# Altium PCB ThermistorMux.PcbDoc
Units mil, origin at the board's own origin, x right, y up, seen from the top; angles counter-clockwise.
Board outline 2508 x 3208 mil, 2 copper layers (Top Layer, Top, Bottom Layer, Bottom); 78 components, 38 nets, 180 pads, 36 vias.
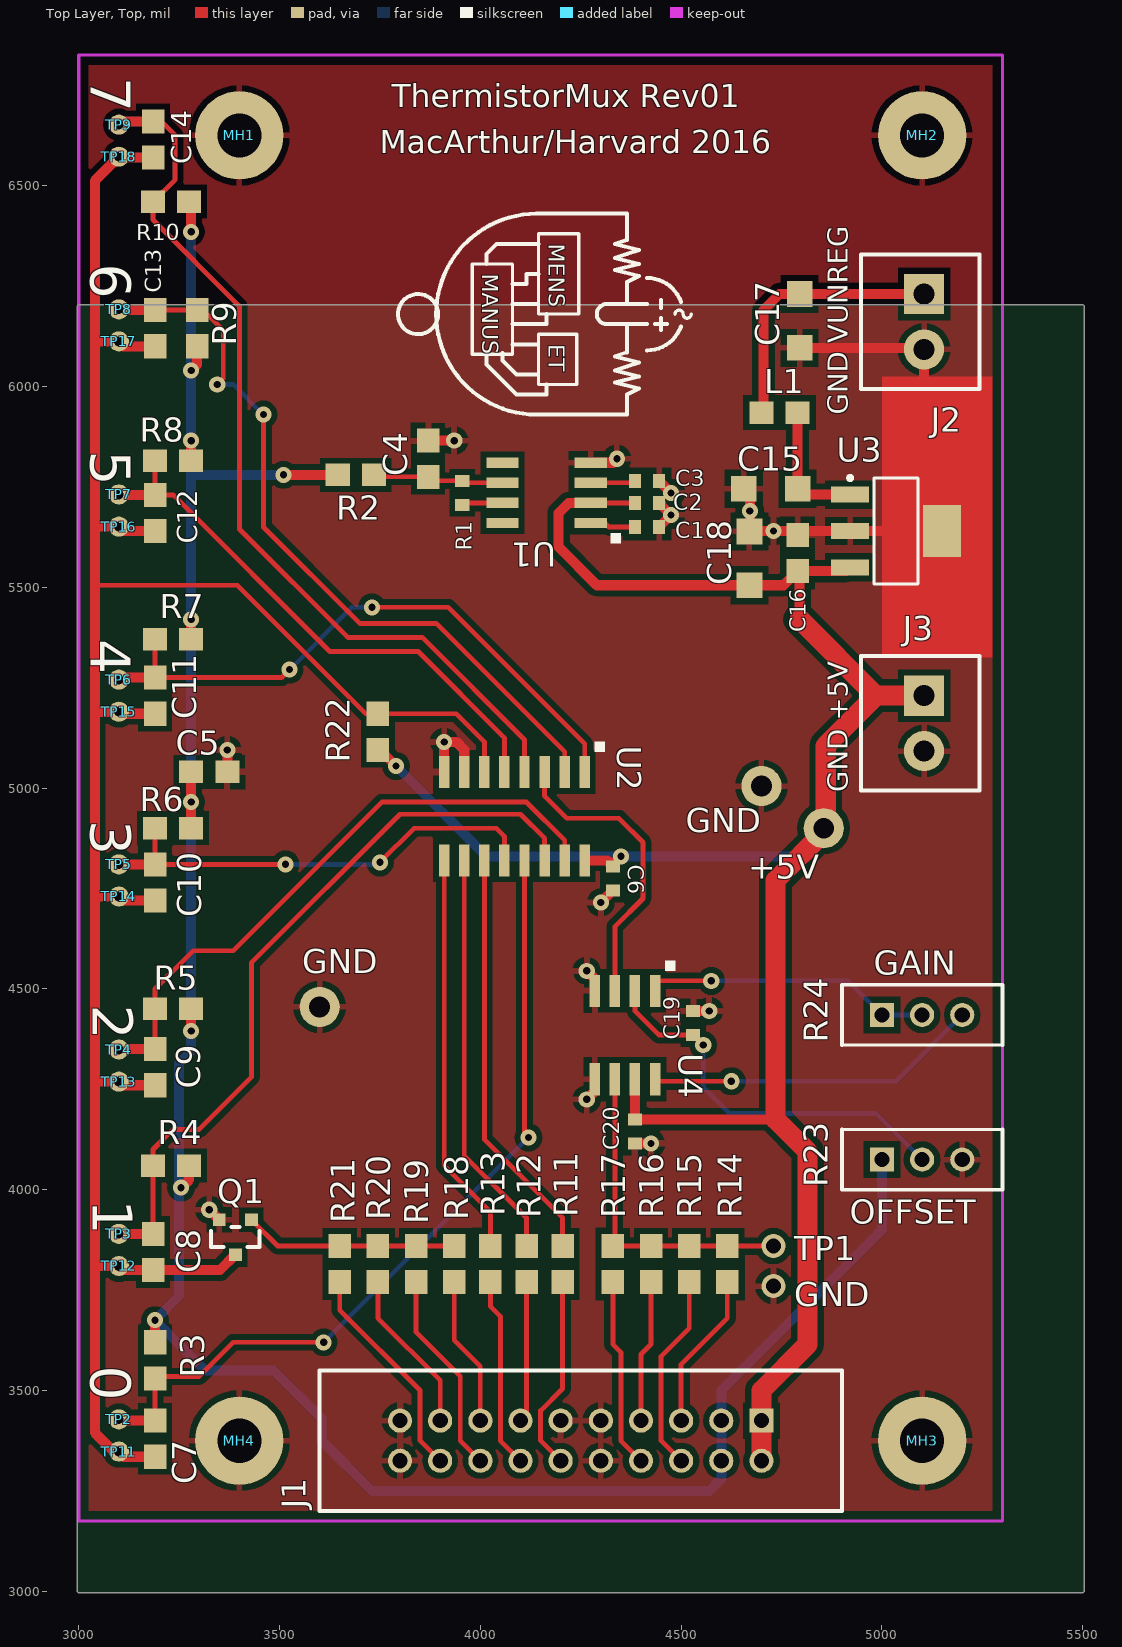
[diagram p0: Top Layer, Top view]
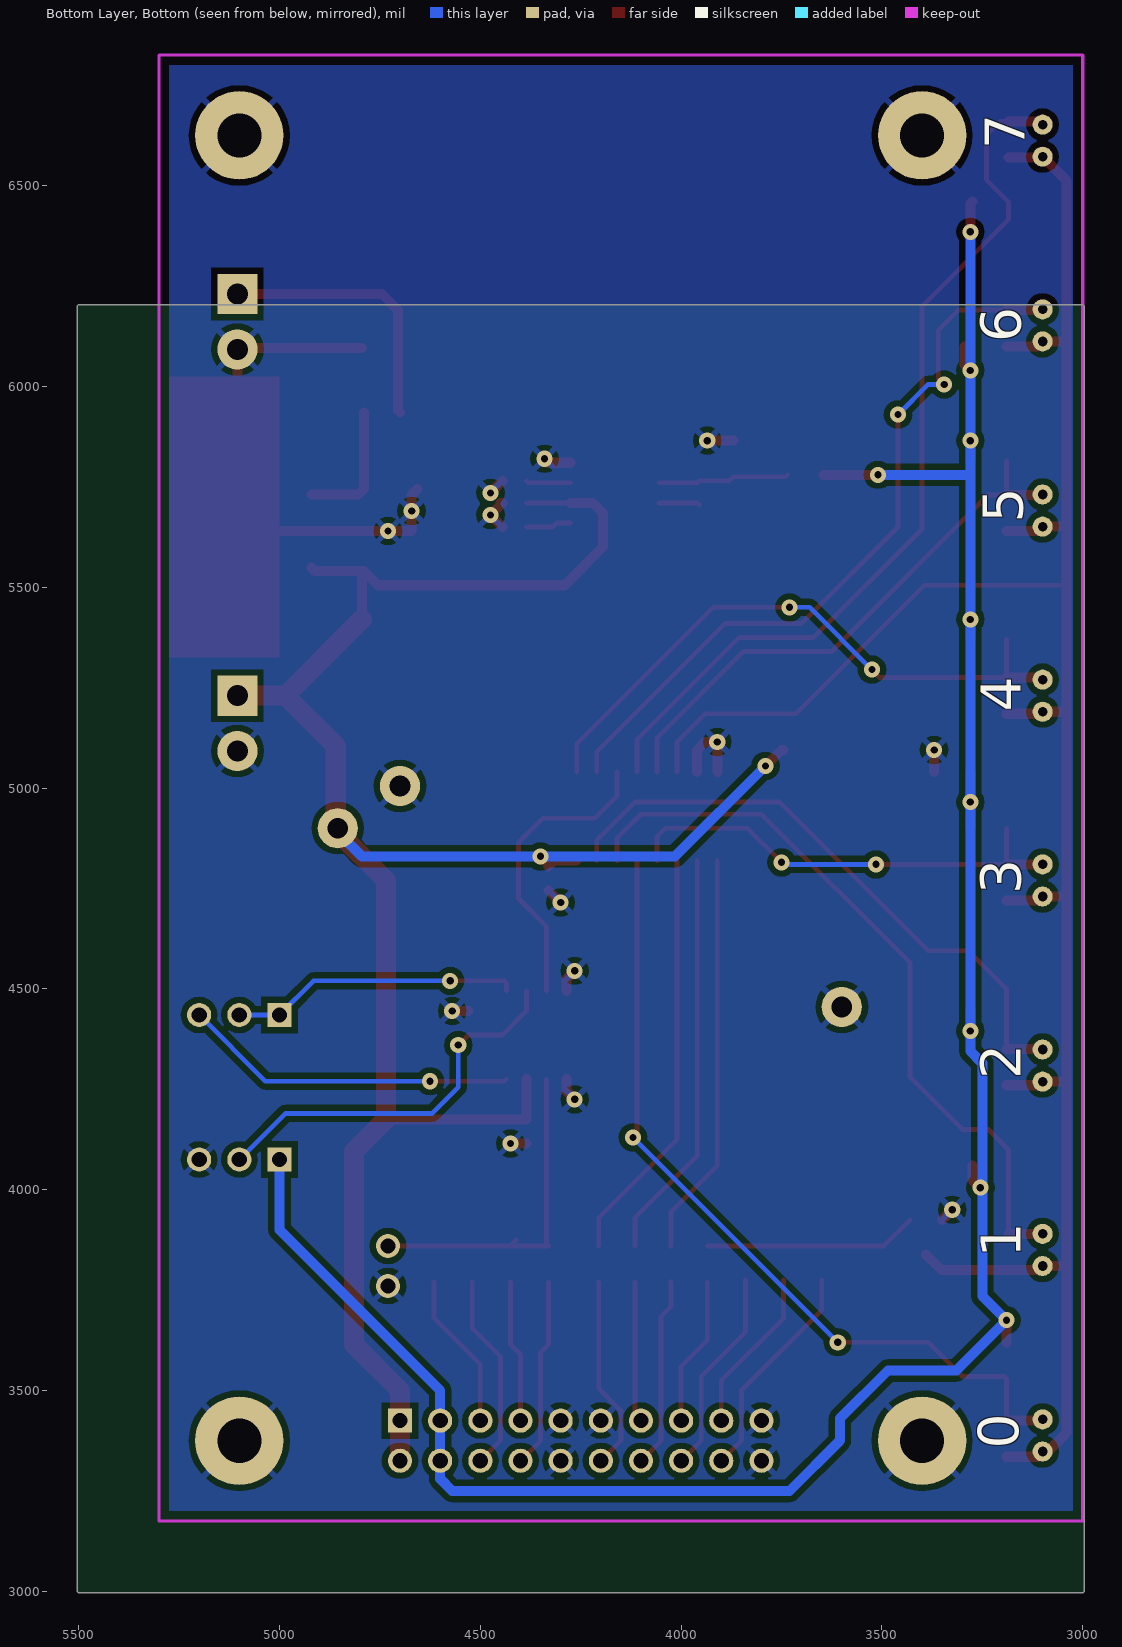
[diagram p1: Bottom Layer, Bottom view, seen from below]

## Layer stack, top to bottom
Top Solder, Top Mask: solder mask 0.4, Solder Resist, Dk 3.5
Top Layer, Top: signal copper 1.4
Dielectric1: dielectric 12.6, FR-4, Dk 4.8
Bottom Layer, Bottom: signal copper 1.4
Bottom Solder, Bot Mask: solder mask 0.4, Solder Resist, Dk 3.5

## Board outline
2996,3000 3000,2996 5500,2996 5504,3000 5504,6200 5500,6204 3000,6204 2996,6200

## Design rules (kind name [scope] priority, off if disabled: settings)
Clearance Clearance_1 [InPolygon] p1: gap=15
Clearance "Clearance_Top Layer, Top_PadToPad" [ExistsOnLayer('Top Layer, Top') And IsPad vs ExistsOnLayer('Top Layer, Top') And IsPad] p2: gap=10
Clearance "Clearance_Top Layer, Top_PadToLine" [ExistsOnLayer('Top Layer, Top') And IsPad vs ExistsOnLayer('Top Layer, Top') And IsWire] p3: gap=10
Clearance "Clearance_Top Layer, Top_LineToLine" [ExistsOnLayer('Top Layer, Top') And IsWire vs ExistsOnLayer('Top Layer, Top') And IsWire] p4: gap=10
Clearance "Clearance_Top Layer, Top_ViaToPad" [ExistsOnLayer('Top Layer, Top') And IsVia vs ExistsOnLayer('Top Layer, Top') And IsPad] p5: gap=10
Clearance "Clearance_Top Layer, Top_ViaToLine" [ExistsOnLayer('Top Layer, Top') And IsVia vs ExistsOnLayer('Top Layer, Top') And IsWire] p6: gap=10
Clearance "Clearance_Top Layer, Top_ViaToVia" [ExistsOnLayer('Top Layer, Top') And IsVia vs ExistsOnLayer('Top Layer, Top') And IsVia] p7: gap=10
Clearance "Clearance_Bottom Layer, Bottom_PadToPad" [ExistsOnLayer('Bottom Layer, Bottom') And IsPad vs ExistsOnLayer('Bottom Layer, Bottom') And IsPad] p8: gap=10
Clearance "Clearance_Bottom Layer, Bottom_PadToLine" [ExistsOnLayer('Bottom Layer, Bottom') And IsPad vs ExistsOnLayer('Bottom Layer, Bottom') And IsWire] p9: gap=10
Clearance "Clearance_Bottom Layer, Bottom_LineToLine" [ExistsOnLayer('Bottom Layer, Bottom') And IsWire vs ExistsOnLayer('Bottom Layer, Bottom') And IsWire] p10: gap=10
Clearance "Clearance_Bottom Layer, Bottom_ViaToPad" [ExistsOnLayer('Bottom Layer, Bottom') And IsVia vs ExistsOnLayer('Bottom Layer, Bottom') And IsPad] p11: gap=10
Clearance "Clearance_Bottom Layer, Bottom_ViaToLine" [ExistsOnLayer('Bottom Layer, Bottom') And IsVia vs ExistsOnLayer('Bottom Layer, Bottom') And IsWire] p12: gap=10
Clearance "Clearance_Bottom Layer, Bottom_ViaToVia" [ExistsOnLayer('Bottom Layer, Bottom') And IsVia vs ExistsOnLayer('Bottom Layer, Bottom') And IsVia] p13: gap=10
Clearance Clearance_Design_HoleToHole [(IsVia Or IsThruPin) vs (IsVia Or IsThruPin)] p14: gap=13
Clearance [All] p15: gap=12
ComponentClearance [All] p1 off: gap=10 collisioncheckmode=3 verticalgap=10 showdistances=FALSE
HoleSize [All] p1: absolutevalues=TRUE maxlimit=200 minlimit=1 maxpercent=80.000 minpercent=20.000
MinimumSolderMaskSliver [All] p1 off: minsoldermaskwidth=10
PlaneClearance [All] p1: clearance=10
PlaneConnect [All] p1: planeconnectstyle=Relief reliefexpansion=20 reliefentries=4 reliefconductorwidth=10 reliefairgap=15
PolygonConnect PolygonConnect_4 [IsPolygon And InNet('GND') And OnLayer('Bottom Layer, Bottom') vs IsVia] p1: connectstyle=Relief reliefconductorwidth=15 reliefentries=4 polygonreliefangle="45 Angle" airgapwidth=15
PolygonConnect PolygonConnect_3 [IsPolygon And InNet('GND') And OnLayer('Bottom Layer, Bottom') vs IsPad] p2: connectstyle=Relief reliefconductorwidth=15 reliefentries=4 polygonreliefangle="45 Angle" airgapwidth=15
PolygonConnect PolygonConnect_2 [IsPolygon And InNet('VCC') And OnLayer('Top Layer, Top') vs IsVia] p3: connectstyle=Relief reliefconductorwidth=15 reliefentries=4 polygonreliefangle="45 Angle" airgapwidth=15
PolygonConnect PolygonConnect_1 [IsPolygon And InNet('VCC') And OnLayer('Top Layer, Top') vs IsPad] p4: connectstyle=Relief reliefconductorwidth=15 reliefentries=4 polygonreliefangle="45 Angle" airgapwidth=15
PolygonConnect [All] p5: connectstyle=Relief reliefconductorwidth=15 reliefentries=4 polygonreliefangle="90 Angle" airgapwidth=15
RoutingVias [All] p1: holewidth=18 width=40 viastyle="Through Hole" minholewidth=18 minwidth=40 maxholewidth=28 maxwidth=50
SilkToSilkClearance [All] p1 off: silktosilkclearance=10
SilkToSolderMaskClearance SilkscreenOverComponentPads [IsPad] p1 off: minsilkscreentomaskgap=10 clearancetoexposedcopper=TRUE
SolderMaskExpansion [All] p1: expansion=4
UnpouredPolygon [All] p1: allowunpoured=FALSE
Width [All] p1: maxlimit=100 minlimit=8 preferedwidth=10 minimp=50.000000 maximp=50.000000 favimp=50.000000
22 further rules are at their usual default settings.

## Components (designator, comment, footprint, x,y, rotation, side; value= is the part's Value field where it differs from the comment)
+5V "TP52" TP52 4855,4900 r90 top (schematic designator TP19)
C1 "CAP0603" RC0603 4445,5650 r0 top
C2 "CAP0603" RC0603 4445,5710 r0 top
C3 "CAP0603" RC0603 4445,5765 r0 top
C4 "CAP0805" RC0805_CAP0805(Primary) 3870,5775 r90 top
C5 "CAP0805" RC0805_CAP0805(Primary) 3280,5040 r0 top
C6 "CAP0603" RC0603 4330,4745 r270 top
C7 "CAP0805" RC0805_CAP0805(Primary) 3190,3425 r270 top
C8 "CAP0805" RC0805_CAP0805(Primary) 3185,3890 r270 top
C9 "CAP0805" RC0805_CAP0805(Primary) 3190,4350 r270 top
C10 "CAP0805" RC0805_CAP0805(Primary) 3190,4810 r270 top
C11 "CAP0805" RC0805_CAP0805(Primary) 3190,5275 r270 top
C12 "CAP0805" RC0805_CAP0805(Primary) 3190,5730 r270 top
C13 "CAP0805" RC0805_CAP0805(Primary) 3190,6190 r270 top
C14 "CAP0805" RC0805_CAP0805(Primary) 3185,6660 r270 top
C15 "CAP1206" RC1206_CAP1206(Primary) 4790,5745 r180 top
C16 "CAP0805" RC0805_CAP0805(Primary) 4790,5540 r90 top
C17 "CAP1206" RC1206_CAP1206(Primary) 4795,6230 r270 top
C18 "CAP1206" RC1206_CAP1206(Primary) 4670,5505 r90 top
C19 "CAP0603" RC0603 4530,4445 r90 top
C20 "CAP0603" RC0603 4385,4115 r270 top
GND "TP52" TP52 4700,5005 r90 top (schematic designator TP21)
GND "TP52" TP52 3600,4455 r90 top (schematic designator TP20)
GND "TP38" TP38#1 4730,3790 r90 top (schematic designator TP10)
J1 "HDR10X2" HDR10X2 4700,3425 r180 top
J2 "CONN2P35MM" CONN2P35MM 5105,6230 r270 top
J3 "CONN2P35MM" CONN2P35MM 5105,5230 r270 top
L1 "IND0805" RC0805_IND0805(Primary) 4790,5935 r180 top
MH1 "MH440" M440#1 3415,6615 r0 top
MH2 "MH440" M440#2 4980,6640 r0 top
MH3 "MH440" M440#3 5090,3365 r0 top
MH4 "MH440" M440#4 3395,3370 r0 top
Q1 "BSS138" SOT-23 3430,3925 r180 top
R1 "RES0603" RC0603 3955,5765 r90 top
R2 "RES0805" RC0805_RES0805(Primary) 3735,5780 r180 top
R3 "RES0805" RC0805_RES0805(Primary) 3190,3530 r90 top
R4 "RES0805" RC0805_RES0805(Primary) 3185,4060 r0 top
R5 "RES0805" RC0805_RES0805(Primary) 3190,4450 r0 top
R6 "RES0805" RC0805_RES0805(Primary) 3190,4900 r0 top
R7 "RES0805" RC0805_RES0805(Primary) 3190,5370 r0 top
R8 "RES0805" RC0805_RES0805(Primary) 3190,5815 r0 top
R9 "RES0805" RC0805_RES0805(Primary) 3295,6190 r270 top
R10 "RES0805" RC0805_RES0805(Primary) 3185,6460 r0 top
R11 "RES0805" RC0805_RES0805(Primary) 4205,3770 r90 top
R12 "RES0805" RC0805_RES0805(Primary) 4115,3770 r90 top
R13 "RES0805" RC0805_RES0805(Primary) 4025,3770 r90 top
R14 "RES0805" RC0805_RES0805(Primary) 4615,3770 r90 top
R15 "RES0805" RC0805_RES0805(Primary) 4520,3770 r90 top
R16 "RES0805" RC0805_RES0805(Primary) 4425,3770 r90 top
R17 "RES0805" RC0805_RES0805(Primary) 4330,3770 r90 top
R18 "RES0805" RC0805_RES0805(Primary) 3935,3770 r90 top
R19 "RES0805" RC0805_RES0805(Primary) 3840,3770 r90 top
R20 "RES0805" RC0805_RES0805(Primary) 3745,3770 r90 top
R21 "RES0805" RC0805_RES0805(Primary) 3650,3770 r90 top
R22 "RES0805" RC0805_RES0805(Primary) 3745,5185 r270 top
R23 "TRIMPOT38" TRIM38 5000,4075 r180 top
R24 "TRIMPOT38" TRIM38 5000,4435 r180 top
TP1 "TP38" TP38#2 4745,3870 r0 top
TP2 "TP24" TP24#1 3240,3200 r90 top
TP3 "TP24" TP24#2 3195,3825 r90 top
TP4 "TP24" TP24#3 3200,4275 r90 top
TP5 "TP24" TP24#4 3205,4700 r90 top
TP6 "TP24" TP24#5 3410,5250 r90 top
TP7 "TP24" TP24#6 3175,5600 r90 top
TP8 "TP24" TP24#7 3420,6025 r90 top
TP9 "TP24" TP24#8 3200,6625 r90 top
TP11 "TP24" TP24#9 3105,3200 r90 top
TP12 "TP24" TP24#10 3090,3825 r90 top
TP13 "TP24" TP24#11 3095,4275 r90 top
TP14 "TP24" TP24#12 3100,4700 r90 top
TP15 "TP24" TP24#13 3280,5250 r90 top
TP16 "TP24" TP24#14 3285,5600 r90 top
TP17 "TP24" TP24#15 3115,6050 r90 top
TP18 "TP24" TP24#16 3095,6625 r90 top
U1 "VREFSO8" SO8 4275,5660 r180 top
U2 "74HCT4051M" SO16 4260,5040 r270 top
U3 "LM340MP-5.0" MP04A_N 5035,5640 r0 top
U4 "AD623BR" SO8 4435,4495 r270 top

## Footprints (in the part's own frame and the unit in brackets; to place one, negate y for a bottom-side part, rotate by r counter-clockwise, add the part's x,y. Pads: shape width x height; smd on the part's side, far side on the other; paste and mask are expansions set on the pad)
CONN2P35MM [mil]
  rect 100x100 hole 52: 1(0,0)
  round 100 hole 52: 2(137.8,0)
  silkscreen extent -98,-157 236,138
HDR10X2 [mil]
  rect 60x60 hole 38: 1(0,0)
  round 60 hole 38: 2(0,100) 3(100,0) 4(100,100) 5(200,0) 6(200,100) 7(300,0) 8(300,100) 9(400,0) 10(400,100) 11(500,0) 12(500,100) 13(600,0) 14(600,100) 15(700,0) 16(700,100) 17(800,0) 18(800,100) 19(900,0) 20(900,100)
  silkscreen extent -200,-125 1100,225
M440#1 [mil]
  round 220 hole 110: 1(-15,10)
M440#2 [mil]
  round 220 hole 110: 1(120,-15)
M440#3 [mil]
  round 220 hole 110: 1(10,10)
M440#4 [mil]
  round 220 hole 110: 1(5,5)
MP04A_N [mm] "SOT223, 4-Leads, Body 6.5x3.5mm, Pitch 2.3mm, Lead Span 7mm, IPC Medium Density"
  rect 2.4x1 smd: 1(-2.9,2.3) 2(-2.9,0) 3(-2.9,-2.3)
  rect 2.4x3.3 smd: 4(2.9,0)
  silkscreen extent -3.02,-3.35 1.4,3.47, body extent -1.86,-3.35 1.86,3.35, height 1.8
RC0603 [mil]
  rect 30x35 smd: 1(0,0) 2(-60,0)
RC0805_CAP0805(Primary) [mil]
  rect 60x56 smd: A(0,0) B(90,0)
RC0805_IND0805(Primary) [mil]
  rect 60x56 smd: A(0,0) B(90,0)
RC0805_RES0805(Primary) [mil]
  rect 60x56 smd: A(0,0) B(90,0)
RC1206_CAP1206(Primary) [mil]
  rect 64x64 smd: A(0,0) B(134,0)
SO8 [mil]
  rect 80x26 smd: 1(0,0) 2(0,-50) 3(0,-100) 4(0,-150) 5(220,-150) 6(220,-100) 7(220,-50) 8(220,0)
  silkscreen extent -75,25 -50,50
SO16 [mil]
  rect 80x26 smd: 1(0,0) 2(0,-50) 3(0,-100) 4(0,-150) 5(0,-200) 6(0,-250) 7(0,-300) 8(0,-350) 9(220,-350) 10(220,-300) 11(220,-250) 12(220,-200) 13(220,-150) 14(220,-100) 15(220,-50) 16(220,0)
  silkscreen extent -75,25 -50,50
SOT-23 [mil]
  rect 32x32 smd: 1(0,0) 2(80,0) 3(40,87)
  silkscreen extent -20,18 100,68
TP24#1 [mil] "designed for 50 mil spacing"
  round 50 hole 24: 1(228,140)
TP24#2 [mil] "designed for 50 mil spacing"
  round 50 hole 24: 1(65,95)
TP24#3 [mil] "designed for 50 mil spacing"
  round 50 hole 24: 1(74,100)
TP24#4 [mil] "designed for 50 mil spacing"
  round 50 hole 24: 1(110,105)
TP24#5 [mil] "designed for 50 mil spacing"
  round 50 hole 24: 1(20,310)
TP24#6 [mil] "designed for 50 mil spacing"
  round 50 hole 24: 1(131,75)
TP24#7 [mil] "designed for 50 mil spacing"
  round 50 hole 24: 1(167,320)
TP24#8 [mil] "designed for 50 mil spacing"
  round 50 hole 24: 1(27,100)
TP24#9 [mil] "designed for 50 mil spacing"
  round 50 hole 24: 1(148,5)
TP24#10 [mil] "designed for 50 mil spacing"
  round 50 hole 24: 1(-15,-10)
TP24#11 [mil] "designed for 50 mil spacing"
  round 50 hole 24: 1(-6,-5)
TP24#12 [mil] "designed for 50 mil spacing"
  round 50 hole 24: 1(30,0)
TP24#13 [mil] "designed for 50 mil spacing"
  round 50 hole 24: 1(-60,180)
TP24#14 [mil] "designed for 50 mil spacing"
  round 50 hole 24: 1(51,185)
TP24#15 [mil] "designed for 50 mil spacing"
  round 50 hole 24: 1(62,15)
TP24#16 [mil] "designed for 50 mil spacing"
  round 50 hole 24: 1(-53,-5)
TP38#1 [mil]
  round 60 hole 38: 1(-30,0)
TP38#2 [mil]
  round 60 hole 38: 1(-15,-10)
TP52 [mil]
  round 100 hole 52: 1(0,0)
TRIM38 [mil]
  rect 60x60 hole 38: 1(0,0)
  round 60 hole 38: 2(-100,0) 3(-200,0)
  silkscreen extent -300,-75 100,75

## Part data
U3: "Series 3-Terminal Positive Regulators"
U4: library part AD620BR, "AD620BR"

## Via types
v1: diameter 40, hole 18, Top Layer, Top to Bottom Layer, Bottom, 36 vias

## Nets (pads, with @x,y where several pads share a name; then routed paths per layer and width w, separated by ;. In a path a pad name is that pad's centre, name@x,y a point inside that pad or via, vN(x,y) a via of type N, cw(c..) or ccw(c..) an arc to the next point about the centre after c; other vN are vias at no path point)
+5V: +5V.1 C2.2 C6.2 C16.A C18.A C20.2 J1.1 J1.2 J3.1 R22.B U1.2 U2.16 U3.3 U4.7 | length 5480.2
  Top Layer, Top w12: U1.2 C2.2
  Top Layer, Top w25: R22.B 3750,5095 v1(3790,5055) ; U2.16 4315,4820 C6.2 4330,4810 v1(4350,4830) ; U1.2 4220,5710 4195,5685 4195,5600 4290,5505 C18.A 4755,5505 C16.A ; U4.7 C20.2 4735,4175 ; 4795,5420 4795,5535 C16.A ; U3.3 4911.38,5540 C16.A
  Top Layer, Top w50: J1.2 J1.1 4700,3500 4815,3615 4815,4095 4735,4175 4735,4770 4860,4895 4860,5105 4985,5230 ; 4795,5420 4985,5230 ; J3.1 4985,5230
  Bottom Layer, Bottom w25: v1(3790,5055) 4015,4830 v1(4350,4830) 4795,4830 +5V.1@4860,4895
GND: C1.1 C2.1 C3.1 C4.B C5.B C6.1 C15.B C16.B C17.B C18.B C19.1 C20.1 GND.1 J1.9 J1.10 J1.11 J1.19 J1.20 J2.2 J3.2 MH1.1 MH2.1 MH3.1 MH4.1 Q1.2 R23.3 U1.4 U2.7 U2.8 U3.2 U3.4 U4.4 U4.5 | length 1802.2
  Top Layer, Top w25: v1(3325,3950) Q1.2 ; C5.B v1(3370,5095) ; C4.B v1(3935,5865) ; U2.8 v1(3910,5115) 3940,5115 3960,5095 U2.7 ; v1(4265,4225) 4285,4245 U4.5 ; v1(4265,4545) 4285,4525 U4.4 ; U1.4 4330,5810 v1(4340,5820) ; v1(4300,4715) C6.1 ; C20.1 v1(4425,4115) ; C1.1 v1(4475,5680) C2.1 C2.1@4450,5710 ; C3.1 v1(4475,5735) ; C19.1 v1(4570,4445) ; C15.B 4671,5730 v1(4671,5690) 4671,5640 v1(4730,5640) U3.2 U3.4 ; C17.B 5101.2,6096 J2.2 5105,5975
NetC1_2: C1.2 U1.1 | length 114.1
  Top Layer, Top w12: U1.1 4310,5660 4320,5650 C1.2
NetC3_2: C3.2 U1.3 | length 112.1
  Top Layer, Top w12: U1.3 4380,5760 C3.2
NetC4_A: C4.A R1.1 R2.A U1.6 | length 328.3
  Top Layer, Top w12: R2.A 3740,5775 C4.A 3880,5765 R1.1 3960,5760 U1.6
NetC7_A: C7.A R3.A TP2.1 U2.13 | length 2068.9
  Top Layer, Top w12: C7.A R3.A 3195,3535 3300,3535 3385,3620 v1(3610,3620) ; U2.13 4110,4140 v1(4120,4130)
  Top Layer, Top w25: TP2.1 3103,3425 C7.A
  Bottom Layer, Bottom w12: v1(3610,3620) v1(4120,4130)
NetC7_B: C7.B C8.B C9.B C10.B C11.B C12.B C13.B C14.B Q1.3 R22.A TP11.1 TP12.1 TP13.1 TP14.1 TP15.1 TP16.1 TP17.1 TP18.1 U2.6 | length 5810.1
  Top Layer, Top w12: 3040,5505 3395,5505 3715,5185 3940,5185 4010,5115 U2.6
  Top Layer, Top w25: C14.B 3102,6570 TP18.1 3040,6512 3040,6110 ; C7.B 3113,3335 TP11.1 3087,3348 3040,3395 3040,3810 ; C9.B 3109,4260 TP13.1 3041,4269 3040,4270 ; C10.B 3110,4720 TP14.1 3040,4730 ; C11.B 3105,5185 TP15.1 3040,5190 ; C12.B 3111,5640 TP16.1 3041,5651 3040,5650 ; C13.B 3112,6100 TP17.1 3042,6112 3040,6110 ; Q1.3 3352,3800 C8.B 3110,3800 TP12.1 3040,3810 ; 3040,3810 3040,4270 ; 3040,4270 3040,4730 ; 3040,4730 3040,5190 ; 3040,5190 3040,5505 3040,5650 ; 3040,5650 3040,6110
NetC8_A: C8.A R4.A TP3.1 U2.14 | length 1862.7
  Top Layer, Top w12: C8.A R4.A 3185,4100 3235,4150 3300,4150 3430,4280 3430,4565 3800,4935 4100,4935 4160,4875 U2.14
  Top Layer, Top w25: TP3.1 C8.A
NetC9_A: C9.A R5.A TP4.1 U2.15 | length 1542.4
  Top Layer, Top w12: C9.A R5.A 3190,4500 3285,4595 3385,4595 3755,4965 4115,4965 4210,4870 U2.15
  Top Layer, Top w25: TP4.1 3101,4350 C9.A
NetC10_A: C10.A R6.A TP5.1 U2.12 | length 1155.6
  Top Layer, Top w12: R6.A C10.A v1(3515,4810) ; v1(3750,4815) 3835,4900 4040,4900 4060,4880 U2.12
  Top Layer, Top w25: TP5.1 C10.A
  Bottom Layer, Bottom w12: v1(3515,4810) 3745,4810 v1(3750,4815)
NetC11_A: C11.A R7.A TP6.1 U2.1 | length 1540.4
  Top Layer, Top w12: R7.A C11.A 3505,5275 v1(3525,5295) ; v1(3730,5450) 3920,5450 4260,5110 U2.1
  Top Layer, Top w25: TP6.1 3105,5275 C11.A
  Bottom Layer, Bottom w12: v1(3525,5295) 3680,5450 v1(3730,5450)
NetC12_A: C12.A R8.A TP7.1 U2.5 | length 1381
  Top Layer, Top w12: R8.A C12.A 3235,5730 3625,5340 3845,5340 4060,5125 U2.5
  Top Layer, Top w25: TP7.1 3101,5730 C12.A
NetC13_A: C13.A R9.A TP8.1 U2.2 | length 1880.8
  Top Layer, Top w12: C13.A R9.A 3310,6190 3360,6140 3360,6020 v1(3345,6005) ; v1(3460,5930) 3460,5650 3700,5410 3890,5410 4210,5090 U2.2
  Top Layer, Top w25: TP8.1 3102,6190 C13.A
  Bottom Layer, Bottom w12: v1(3345,6005) 3385,6005 v1(3460,5930)
NetC14_A: C14.A R10.A TP9.1 U2.4 | length 2257.1
  Top Layer, Top w12: C14.A 3205,6660 3240,6625 3240,6515 R10.A 3185,6415 3400,6200 3400,5645 3670,5375 3855,5375 4110,5120 U2.4
  Top Layer, Top w25: TP9.1 3108,6660 C14.A
NetC15_A: C15.A L1.A U3.1 | length 326.8
  Top Layer, Top w25: L1.A C15.A 4804.45,5730.55 U3.1
NetC17_A: C17.A J2.1 L1.B | length 673.6
  Top Layer, Top w25: L1.B 4705,5940 4705,6190 4745,6230 C17.A J2.1
NetC19_2: C19.2 R23.2 U4.2 | length 979.8
  Top Layer, Top w12: U4.2 4385,4445 4445,4385 C19.2 v1(4555,4360)
  Bottom Layer, Bottom w12: v1(4555,4360) 4555,4255 4620,4190 4985,4190 R23.2
NetJ1_5: J1.5 R14.A | length 392.6
  Top Layer, Top w12: J1.5 4500,3565 4615,3680 R14.A
NetJ1_6: J1.6 R15.A | length 494.7
  Top Layer, Top w12: J1.6 4450,3375 4450,3585 4520,3655 R15.A
NetJ1_7: J1.7 R16.A | length 355.4
  Top Layer, Top w12: J1.7 4400,3590 4425,3615 R16.A
NetJ1_8: J1.8 R17.A | length 474
  Top Layer, Top w12: R17.A 4330,3615 4350,3595 4350,3375 J1.8
NetJ1_12: J1.12 R11.A | length 488.5
  Top Layer, Top w12: J1.12 4150,3375 4150,3450 4205,3505 R11.A
NetJ1_13: J1.13 R12.A | length 351.2
  Top Layer, Top w12: J1.13 4115,3440 R12.A
NetJ1_14: J1.14 R13.A | length 476.1
  Top Layer, Top w12: R13.A 4025,3710 4050,3685 4050,3375 J1.14
NetJ1_15: J1.15 R18.A | length 371.9
  Top Layer, Top w12: R18.A 3935,3625 4000,3560 J1.15
NetJ1_16: J1.16 R19.A | length 516.3
  Top Layer, Top w12: R19.A@3840,3775 3840,3645 3950,3535 3950,3375 J1.16
NetJ1_17: J1.17 R20.A | length 414.2
  Top Layer, Top w12: R20.A@3745,3775 3745,3680 3900,3525 J1.17
NetJ1_18: J1.18 R21.A | length 553.6
  Top Layer, Top w12: R21.A@3650,3775 3650,3700 3850,3500 3850,3375 J1.18
NetQ1_1: Q1.1 R18.B R19.B R20.B R21.B | length 531.9
  Top Layer, Top w12: Q1.1 3495,3860 R21.B R20.B R19.B R18.B
NetR1_2: R1.2 U1.7 | length 102.1
  Top Layer, Top w12: R1.2 3960,5710 U1.7
NetR11_B: R11.B U2.11 | length 1040.8
  Top Layer, Top w12: U2.11 4010,4125 4205,3930 R11.B
NetR12_B: R12.B U2.10 | length 1024.2
  Top Layer, Top w12: U2.10 3960,4085 4115,3930 R12.B
NetR13_B: R13.B U2.9 | length 1007.6
  Top Layer, Top w12: U2.9 3910,4060 4025,3945 R13.B
NetR24_1: R24.1 R24.2 U4.1 | length 722.3
  Top Layer, Top w12: U4.1 4435,4515 4440,4520 v1(4575,4520)
  Bottom Layer, Bottom w12: v1(4575,4520) 4915,4520 R24.1 R24.2
NetR24_3: R24.3 U4.8 | length 835.4
  Top Layer, Top w12: U4.8 4440,4270 v1(4625,4270)
  Bottom Layer, Bottom w12: v1(4625,4270) 5035,4270 R24.3
PRESIGNAL: U2.3 U4.3 | length 751.6
  Top Layer, Top w12: U2.3 4160,4980 4215,4925 4345,4925 4405,4865 4405,4725 4335,4655 U4.3
SIGNAL: R14.B R15.B R16.B R17.B TP1.1 U4.6 | length 838.3
  Top Layer, Top w12: U4.6 4335,3865 R17.B R16.B ; R16.B@4410,3875 R16.B ; TP1.1 R14.B R15.B R16.B
VREF: C5.A J1.3 J1.4 R2.B R3.B R4.B R5.B R6.B R7.B R8.B R9.B R10.B R23.1 | length 6260.2
  Top Layer, Top w25: R3.B v1(3190,3675) ; v1(3255,4005) 3275,4025 R4.B ; R10.B 3280,6455 v1(3280,6385) ; v1(3280,4395) R5.B ; R6.B v1(3280,4965) C5.A ; R7.B v1(3280,5420) ; R8.B v1(3280,5865) ; v1(3280,6040) 3295,6055 R9.B ; v1(3510,5780) R2.B
  Bottom Layer, Bottom w25: v1(3280,6385) v1(3280,6040) v1(3280,5865) 3280,5780 ; v1(3510,5780) 3280,5780 ; R23.1 5000,3900 4600,3500 J1.3 J1.4 4600,3280 4570,3250 3730,3250 3605,3375 3605,3430 3485,3550 3315,3550 v1(3190,3675) 3250,3735 3250,4315 3280,4345 v1(3280,4395) v1(3280,4965) v1(3280,5420) 3280,5780
pads on no net: U1.5 U1.8

## Polygon pours and split planes (outlines as drawn)
GND on Top Layer, Top "GND" (solid, remove dead copper, pour order 3): 3025,6800 3025,3200 5275,3200 5275,6800
GND on Bottom Layer, Bottom "GND" (solid, remove dead copper, pour order 5): 3025,6800 3025,3200 5275,3200 5275,6800

## Keep-outs
Keep-Out Layer, Board:
  lines w8: 3000,3175 3000,6825 5300,6825 5300,3175 3000,3175
  text "ThermistorMux Rev01 BOARD LAYER" at 3100,7275 h56.88

## Other copper
Top Layer, Top:
  rectangle net GND: 5000,5325 5275,6025
  text "ThermistorMux Rev01 TOP COPPER" at 3100,8100 h56.88
Bottom Layer, Bottom:
  text "ThermistorMux Rev01 BOTTOM COPPER" at 3100,7875 h56.88

## Silkscreen, mask and mechanical layers (free items; w line width, h text height)
Top Overlay, Top Silk:
  circle w10: c3845,6180 r50
  lines w7.87: 3980,6080 3980,6305 4080,6305 4080,6080 3980,6080 ; 4145,6005 4145,6130 4240,6130 4240,6005 4145,6005 ; 4145,6180 4145,6380 4220,6380 4245,6380 4245,6180 4145,6180
  lines w8: 4485,6180 cw(c4495,6180) 4505,6180 ccw(c4515,6180) 4525,6180
  lines w10: 4015,6080 4015,6055 4090,5980 4165,5980 4165,6005 ; 4015,6305 4015,6330 4040,6355 4145,6355 ; 4054.99,6083.39 4054.99,6065.01 4090,6030 4140,6030 ; 4080,6105 4140,6105 ; 4080,6155 4165,6155 4165,6180 ; 4080,6205 4140,6205 ; 4080,6255 4115,6255 4115,6280 4145,6280 ; 4365,6155 4365,6105 4365,6095 4365,6085 4335,6075 4395,6060 4365,6050 4335,6040 4395,6025 4335,6010 4395,5995 4365,5980 4365,5930 4140,5930 cw(c4140,6180) 4140,6430 4365,6430 4365,6380 ; 4365,6205 4365,6255 ; 4365,6260 4395,6275 4335,6290 4395,6305 4335,6320 4365,6330 4395,6340 4335,6355 4365,6365 4365,6375 ; 4415,6090 ccw(c4415,6180) 4499.57,6149.22 ; 4415,6155 4315,6155 cw(c4315,6180) 4315,6205 4415,6205 ; 4415,6270 cw(c4415,6180) 4499.57,6210.78 ; 4435,6155 4465,6155 ; 4450,6140 4450,6170 ; 4450,6195 4450,6215
  text "ThermistorMux Rev01 TOP SILK" at 3100,8500 h56.88
  text "7" at 3030,6770 h100 r270
  text "ThermistorMux Rev01" at 3780,6695 h56.88
  text "MacArthur/Harvard 2016" at 3750,6580 h56.88
  text "MENS" at 4170,6355 h40 r270
  text "6" at 3030,6305 h100 r270
  text "MANUS" at 4005,6280 h40 r270
  text "ET" at 4170,6105 h40 r270
  text "GND VUNREG" at 4915,5930 h50 r90
  text "5" at 3030,5840 h100 r270
  text "4" at 3030,5370 h100 r270
  text "GND +5V" at 4915,4990 h50 r90
  text "3" at 3030,4920 h100 r270
  text "GAIN" at 4980,4535 h60
  text "2" at 3035,4460 h100 r270
  text "1" at 3035,3975 h100 r270
  text "OFFSET" at 4920,3915 h60
  text "0" at 3130,3475 h100 r90
Bottom Overlay, Bot Silk:
  text "ThermistorMux Rev01 BOTTOM SILK" at 3100,7475 h56.88
  text "7" at 3145,6590 h100 r270
  text "6" at 3155,6110 h100 r270
  text "5" at 3150,5660 h100 r270
  text "4" at 3155,5190 h100 r270
  text "3" at 3155,4735 h100 r270
  text "2" at 3155,4275 h100 r270
  text "1" at 3155,3830 h100 r270
  text "0" at 3160,3355 h100 r270
Top Solder, Top Mask:
  text "ThermistorMux Rev01 TOP MASK" at 3100,8300 h56.88
Bottom Solder, Bot Mask:
  text "ThermistorMux Rev01 BOTTOM MASK" at 3100,7675 h56.88